# Altium PCB PCB1.PcbDoc (part 2 of 2)
Units mm, origin at the board's own origin, x right, y up, seen from the top; angles counter-clockwise.
Board outline 75.29 x 33.02 mm, 4 copper layers (Top Layer, Mid Layer 1, Mid Layer 2, Bottom Layer), stack 1.585 mm thick; 47 components, 61 nets, 235 pads, 195 vias.
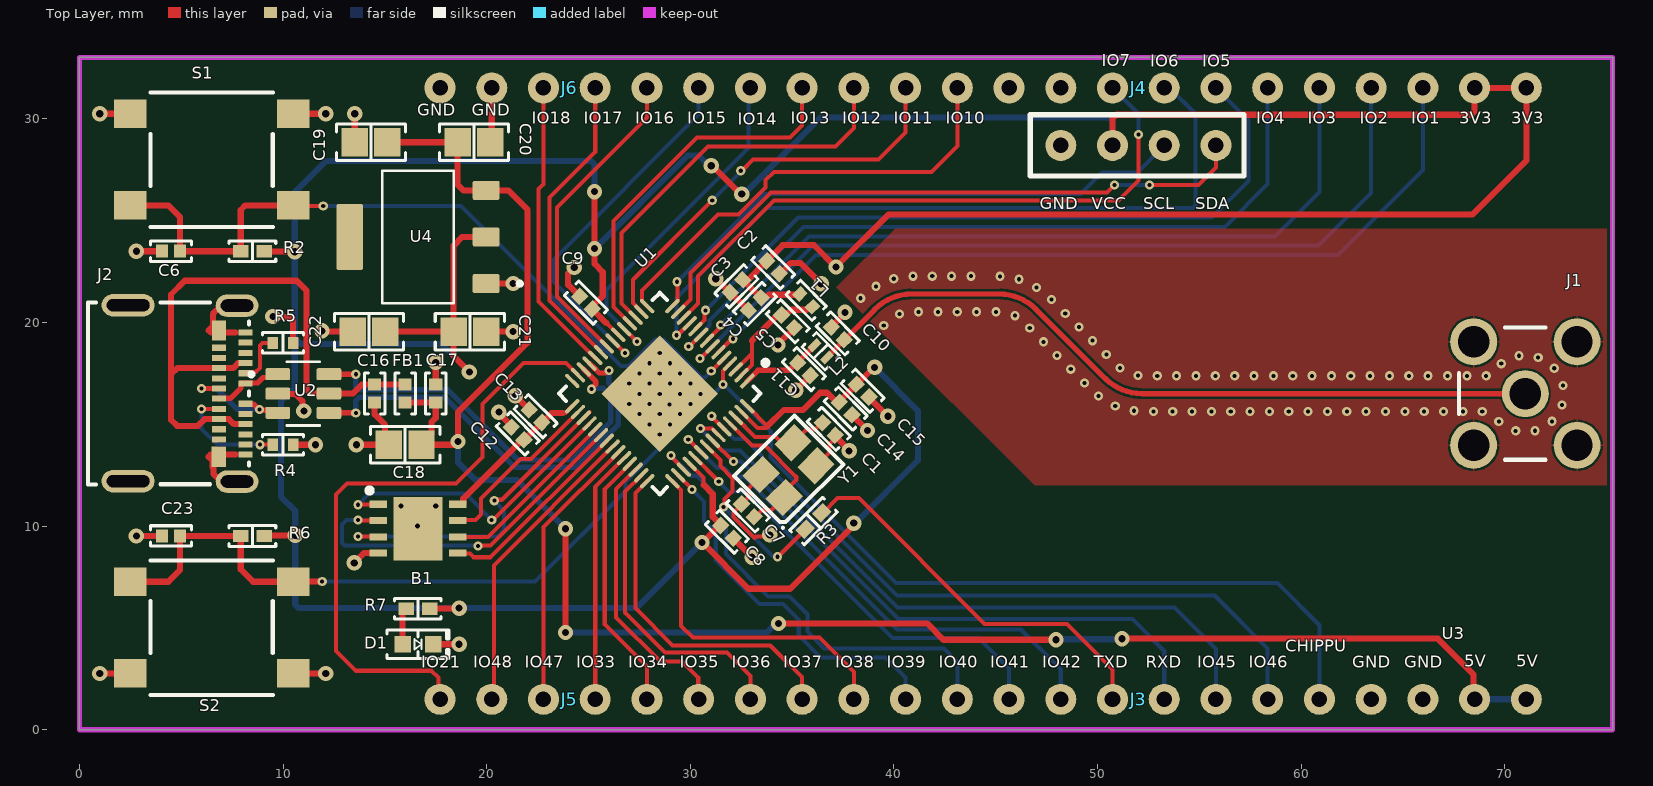
[diagram p0: Top Layer view]

## Via types
v1: diameter 0.45, hole 0.2, Top Layer to Bottom Layer, 144 vias
v2: diameter 0.75, hole 0.35, Top Layer to Bottom Layer, 48 vias
v3: diameter 0.5, hole 0.25, Top Layer to Bottom Layer, 3 vias

## Nets (pads, with @x,y where several pads share a name; then routed paths per layer and width w, separated by ;. In a path a pad name is that pad's centre, name@x,y a point inside that pad or via, vN(x,y) a via of type N, cw(c..) or ccw(c..) an arc to the next point about the centre after c; other vN are vias at no path point) (continued)
GPIO38: J3.14 U1.43 | length 18.1
  Top Layer w0.2: U1.43@29.116,12.213 U1.43 29.12,12.207 29.55,11.778 29.55,5.1 30.125,4.525 36.35,4.525 38.03,2.845 J3.14
GPIO39: J3.13 U1.44 | length 18.2
  Top Layer w0.2: U1.44 30.075,11.824 v1(30.075,11.8)
  Bottom Layer w0.2: v1(30.075,11.8) 30.675,11.2 30.675,10.25 31.25,9.675 31.25,8.325 33.4,6.175 34.55,6.175 35.325,5.4 35.325,4.625 36.4,3.55 39.575,3.55 40.563,2.562 40.563,1.507 J3.13
GPIO40: J3.12 U1.45 | length 23
  Top Layer w0.2: v1(29.05,13.475) 29.05,13.42 29.686,12.784 U1.45
  Bottom Layer w0.2: v1(29.05,13.475) 30.05,12.475 30.325,12.475 31.094,11.706 31.094,10.581 31.75,9.925 31.75,8.625 33.825,6.55 34.875,6.55 35.75,5.675 35.75,4.825 36.575,4 42.45,4 43.11,3.34 J3.12
GPIO41: J3.11 U1.47 | length 21.2
  Top Layer w0.2: U1.47 v1(31.396,12.2)
  Bottom Layer w0.2: v1(31.396,12.2) 31.883,11.712 32.713,11.712 39.925,4.5 44.15,4.5 45.65,3 J3.11
GPIO42: J3.10 U1.48 | length 25.3
  Top Layer w0.2: v1(29.9,14.25) 29.906,14.25 30.529,13.627 U1.48
  Bottom Layer w0.2: v1(29.9,14.25) 31.3,12.85 31.675,12.85 32.1,12.425 32.65,12.425 40.15,4.925 46.225,4.925 48.19,2.96 J3.10
GPIO45: J3.7 U1.51 | length 33.3
  Top Layer w0.2: v1(30.5,14.8) 31.059,14.8 U1.51
  Bottom Layer w0.2: v1(30.5,14.8) 31.575,13.725 32.45,13.725 40.175,6 53.775,6 55.81,3.965 J3.7
GPIO46: J3.6 U1.52 | length 35.6
  Top Layer w0.2: v1(31.05,15.4) 31.05,15.38 31.666,14.764 U1.52
  Bottom Layer w0.2: v1(31.05,15.4) 32.175,14.275 32.7,14.275 33.525,13.45 33.525,13.225 40.15,6.6 55.75,6.6 58.35,4 J3.6
GPIO47: J5.4 U1.37 | length 13.6
  Top Layer w0.2: J5.4 22.79,9.951 U1.37
GPIO48: J5.5 U1.36 | length 14.9
  Top Layer w0.2: J5.5 20.352,1.602 20.352,8.079 U1.36
LNA_IN: C11.2 L2.2 U1.1 | length 4.1
  Top Layer w0.263: U1.1 33.317,17.65 34.847,17.65 35.219,18.022 C11.2 35.268,18.037 36.103,18.872 L2.2
NetC5_2: C5.2 L1.2 U1.2 U1.3 | length 6.7
  Top Layer w0.2: U1.3 33.025,18.489 ; U1.2 33.025,17.924 33.025,18.489 ; 33.025,19.1 33.025,18.489
  Top Layer w0.3: 33.025,19.1 34.297,20.372 34.69,20.372 34.943,20.625 35.709,20.625 35.859,20.775 L1.2
NetC10_2: C10.2 J1.S L2.1 | length 37.3
  Top Layer w0.263: L2.1 36.704,18.295 39.058,20.649 cw(c40.872,18.835) 40.872,21.4 45.162,21.4 cw(c45.162,18.835) 46.976,20.649 50.364,17.261 ccw(c52.178,19.075) 52.178,16.51 J1.S
NetD1_1: D1.1 R7.1 | length 1.8
  Top Layer w0.3: D1.1 15.875,5.8 16.025,5.95 R7.1
NetJ2_A5: J2.A5 R5.2 | length 2.6
  Top Layer w0.2: J2.A5 8.205,17.56 8.66,17.56 8.875,17.775 8.875,18.875 9,19 R5.2
NetJ2_B5: J2.B5 R4.2 | length 5.7
  Top Layer w0.2: v1(6,15.76) J2.B5 ; v1(8.875,14) R4.2
  Bottom Layer w0.2: v1(6,15.76) 6,14.775 6.775,14 v1(8.875,14)
NetR3_2: R3.2 U1.49 | length 9.1
  Top Layer w0.2: U1.49 31.472,13.255 31.472,12.953 32.075,12.35 32.075,11.725 31.675,11.325 v1@31.675,11.025 ; v1@34.323,8.523 R3.2
  Bottom Layer w0.2: v1(31.625,10.937) 34.062,8.5 v1(34.275,8.5)
RXD: J3.8 U1.50 | length 28.8
  Top Layer w0.2: U1.50 v1(32.118,13.175)
  Bottom Layer w0.2: v1(32.118,13.175) 32.5,13.175 40.225,5.45 51.7,5.45 53.27,3.88 J3.8
SPICLK: B1.6 U1.33 | length 9
  Top Layer w0.2: B1.6 20.056,9.475 25.334,14.753 U1.33
SPICS0: B1.1 U1.32 | length 15.1
  Top Layer w0.2: v1(13.675,11.05) 13.688,11.063 14.663,11.063 B1.1 ; v1(20.246,10.304) 20.304,10.304 24.721,14.721 24.726,14.721 25.046,15.041 U1.32
  Bottom Layer w0.2: v1(13.675,11.05) 14.225,11.6 18.95,11.6 v1(20.246,10.304)
SPID: B1.5 U1.35 | length 9.8
  Top Layer w0.2: B1.5 18.6,8.65 19.175,8.65 19.35,8.475 20.182,8.475 U1.35
SPIHD: B1.7 U1.30 | length 8.2
  Top Layer w0.2: B1.7 18.598,10.298 19.448,10.298 19.725,10.575 19.725,11.35 21.672,13.297 22.176,13.297 U1.30@24.232,15.353
SPIQ: B1.2 U1.34 | length 17.8
  Top Layer w0.2: v1@13.7,10.3 13.712,10.288 14.662,10.288 B1.2 ; v1(19.575,9.023) 19.602,9.05 20.191,9.05 U1.34 U1.34@25.621,14.476
  Bottom Layer w0.2: v1(13.675,10.3) 13.125,10.3 12.9,10.075 12.9,9.165 13.017,9.048 19.55,9.048 v1(19.575,9.023)
SPIWP: B1.3 U1.31 | length 16.1
  Top Layer w0.2: v1(13.675,9.5) 13.687,9.488 14.663,9.488 B1.3 ; v1(20.375,11.25) 20.423,11.298 20.742,11.298 U1.31@24.515,15.07 ; U1.31 24.774,15.324 U1.31@25.054,15.604
  Bottom Layer w0.2: v1(13.675,9.5) 19.386,9.5 19.388,9.502 19.762,9.502 19.764,9.5 20.525,9.5 20.85,9.825 20.85,10.775 v1(20.375,11.25)
TXD: J3.9 R3.1 | length 19.5
  Top Layer w0.2: R3.1 36.509,10.657 37.227,11.375 38.275,11.375 44.45,5.2 48.5,5.2 50.73,2.97 J3.9
USBC_N: J2.A7 J2.B7 U2.3 | length 5.9
  Top Layer w0.265: v1(6,16.76) J2.B7 ; J2.A7 8.173,15.992 8.542,15.992 8.799,15.736 v1(8.849,15.736) ; v1@8.805,15.72 8.825,15.7 9.605,15.7 U2.3
  Bottom Layer w0.265: v1(6,16.76) 6.74,16.76 7.764,15.736 v1(8.849,15.736)
USBC_P: J2.A6 J2.B6 U2.1 | length 3.5
  Top Layer w0.265: J2.B6 6.873,16.278 7.423,16.278 7.937,16.792 7.937,16.992 7.955,17.01 J2.A6 8.173,17.028 8.753,17.028 9.022,17.297 9.582,17.297 U2.1
USBO_N: U1.25 U2.4 | length 21.2
  Top Layer w0.265: U2.4 v1(13.575,15.56) ; U1.25@25.062,17.989 25.289,17.762 25.528,17.523 25.822,17.523 25.95,17.65 v1(26,17.65)
  Bottom Layer w0.265: v1(13.575,15.56) 13.575,16.172 13.73,16.327 17.948,16.327 21.391,12.884 24.352,12.884 26.466,14.998 26.466,16.555 25.993,17.029 25.993,17.643 v1(26,17.65)
USBO_P: U1.26 U2.6 | length 20.4
  Top Layer w0.265: U2.6 v1(13.575,17.46) ; U1.26 25.117,17.347 25.363,17.101 25.363,16.989 25.15,16.775 v1(25.15,16.725)
  Bottom Layer w0.265: v1(13.575,17.46) 13.575,16.848 13.73,16.693 18.1,16.693 21.543,13.25 24.2,13.25 26.1,15.15 26.1,16.404 25.734,16.77 25.515,16.77 25.505,16.76 25.185,16.76 v1(25.15,16.725)
VBUS: C16.2 FB1.1 J2.A4 J2.A9 J2.B4 J2.B9 U2.5 | length 31.1
  Top Layer w0.3: J2.B4@6.79,15.26 6.16,15.26 5.825,14.925 4.8,14.925 4.5,15.225 4.5,17.45 ; J2.B4 7.34,15.26 7.59,15.01 J2.A9 ; J2.A4 7.799,18.01 7.549,17.76 4.81,17.76 4.5,17.45 ; FB1.1 C16.2 13.875,16.95 13.435,16.51 U2.5 11.34,16.51 11.15,16.7 11.15,21.575 10.675,22.05 5.175,22.05 4.5,21.375 4.5,17.45
VDD_SPI: B1.8 C12.2 C13.2 U1.29 | length 7.8
  Top Layer w0.2: 23.757,15.556 23.869,15.556 U1.29
  Top Layer w0.3: B1.8 18.825,11.075 18.85,11.1 18.85,11.35 21.739,14.239 21.849,14.239 22.699,15.089 22.729,15.089 23.196,15.556 23.757,15.556
XTAL_N: C7.2 U1.53 Y1.1 | length 7.5
  Top Layer w0.2: U1.53 33.021,13.969 33.656,13.969 35.2,12.425 35.2,12.259 34.613,11.672 Y1.1 34.581,11.406 33.975,10.8 33.525,10.8 33.189,10.464 C7.2
XTAL_P: C1.1 U1.54 Y1.3 | length 5.2
  Top Layer w0.2: U1.54 33.181,14.375 34.212,14.375 34.493,14.094 Y1.3 35.694,14.75 36.114,14.75 36.45,15.086 C1.1
pads on no net: J2.A2 J2.A3 J2.A8 J2.A10 J2.A11 J2.B2 J2.B3 J2.B8 J2.B10 J2.B11 J4.10 J4.11 U1.28 U4.4

## Polygon pours and split planes (outlines as drawn)
GND on Top Layer "GND_L01_P000" (solid, pour order 0): 75,12 75,24.6 40.05,24.6 37.175,21.725 46.9,12 51.5,12
GND on Mid Layer 1 (split plane): 74.778,0.51 0.51,0.51 0.51,32.51 74.778,32.51
GND on Mid Layer 2 (split plane): 74.778,0.51 0.51,0.51 0.51,32.51 74.778,32.51

## Keep-outs
Keep-Out Layer:
  the board outline again, w0.254

## Silkscreen, mask and mechanical layers (free items; w line width, h text height)
Top Overlay:
  text "IO7" at 50.2,32.386 h1
  text "IO6" at 52.575,32.361 h1
  text "IO5" at 55.125,32.361 h1
  text "GND" at 16.6,29.961 h1
  text "GND" at 19.275,29.961 h1
  text "IO18" at 22.22,29.561 h1
  text "IO17" at 24.76,29.561 h1
  text "IO16" at 27.3,29.561 h1
  text "IO15" at 29.84,29.561 h1
  text "IO13" at 34.92,29.561 h1
  text "IO12" at 37.46,29.561 h1
  text "IO11" at 40,29.561 h1
  text "IO10" at 42.54,29.561 h1
  text "IO4" at 57.78,29.561 h1
  text "IO3" at 60.32,29.561 h1
  text "IO2" at 62.86,29.561 h1
  text "IO1" at 65.4,29.561 h1
  text "3V3" at 67.76,29.561 h1
  text "3V3" at 70.3,29.561 h1
  text "IO14" at 32.33,29.511 h1
  text "CHIPPU" at 59.2,3.636 h1
  text "5V" at 68.01,2.911 h1
  text "5V" at 70.55,2.911 h1
  text "IO21" at 16.79,2.861 h1
  text "IO48" at 19.33,2.861 h1
  text "IO47" at 21.87,2.861 h1
  text "IO33" at 24.41,2.861 h1
  text "IO34" at 26.95,2.861 h1
  text "IO35" at 29.49,2.861 h1
  text "IO36" at 32.03,2.861 h1
  text "IO37" at 34.57,2.861 h1
  text "IO38" at 37.11,2.861 h1
  text "IO39" at 39.65,2.861 h1
  text "IO40" at 42.19,2.861 h1
  text "IO41" at 44.73,2.861 h1
  text "IO42" at 47.27,2.861 h1
  text "IO45" at 54.89,2.861 h1
  text "IO46" at 57.43,2.861 h1
  text "GND" at 62.51,2.861 h1
  text "GND" at 65.05,2.861 h1
  text "TXD" at 49.81,2.85 h1
  text "RXD" at 52.35,2.85 h1
Bottom Overlay:
  region: 3961 vertices and 2 holes, not listed, extent 20.274,7.594 37.368,24.677
  text "Designed By Furkan Elkıran" at 74.375,8.176 h2
  text "22/09/2025" at 74.377,6.297 h2

## Text inside footprints (layer, text, board x,y; h text height)
U3: Top Overlay "GND" at 47.165,25.371 h1; Top Overlay "VCC" at 49.706,25.371 h1; Top Overlay "SDA" at 54.785,25.371 h1; Top Overlay "SCL" at 52.245,25.371 h1